# Altium PCB PowerSplitter.PcbDoc
Units mm, origin at the board's own origin, x right, y up, seen from the top; angles counter-clockwise.
Board outline 20 x 20 mm, 2 copper layers (Top Layer, Bottom Layer); 6 components, 5 nets, 21 pads, 0 vias.
Unrouted connection lines stored in the file: 1.
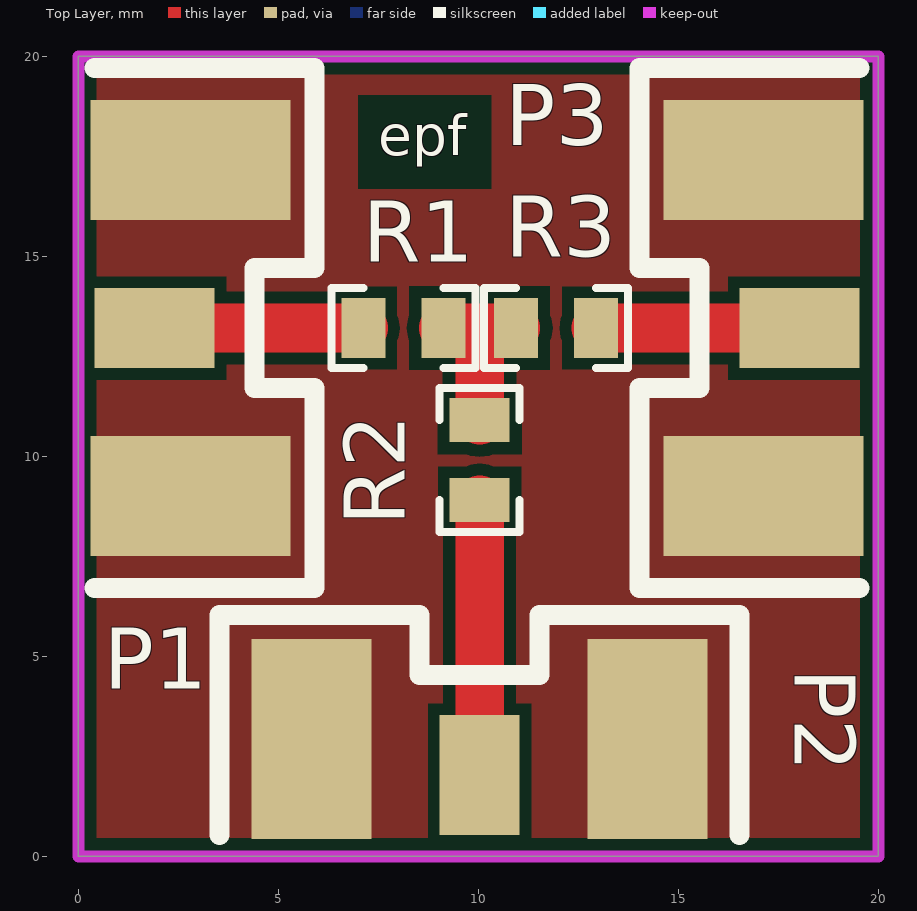
[diagram p0: Top Layer view]
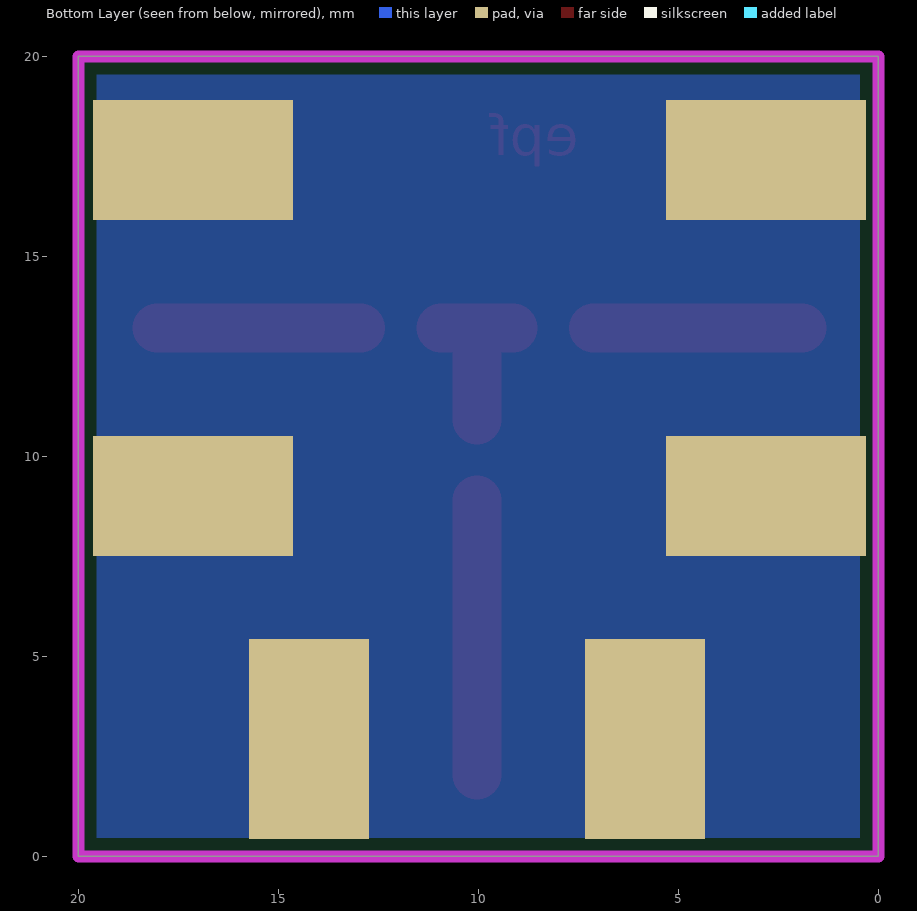
[diagram p1: Bottom Layer view, seen from below]

## Layer stack, top to bottom
Top Layer: signal copper 0.0356
Dielectric: dielectric 0.32, FR-4, Dk 4.8
Bottom Layer: signal copper 0.0356

## Board outline
0,0 20,0 20,20 0,20

## Design rules (kind name [scope] priority, off if disabled: settings)
Clearance [All] p1: gap=0.3
PolygonConnect [All] p1: connectstyle=Direct reliefconductorwidth=0.254 reliefentries=4 polygonreliefangle="90 Angle"
RoomDefinition DivisorPotResistva [InComponentClass('DivisorPotResistva')] p1: confinementstyle=ConfineIn formatcopy=TRUE lockcomponents=TRUE outline -11.684,-9.779 29.845,-9.779 29.845,24.765 -11.684,24.765
RoutingVias [All] p1: holewidth=0.6 width=1 viastyle="Through Hole" minholewidth=0.711 minwidth=1.27 maxholewidth=0.711 maxwidth=1.27
SilkscreenOverComponentPads [All] p1: minsilkscreentomaskgap=0.254
SolderMaskExpansion [All] p1: expansion=0.102
Width [All] p1: maxlimit=2 minlimit=0.2 preferedwidth=1.219
27 further rules are at their usual default settings.

## Components (designator, comment, footprint, x,y, rotation, side; value= is the part's Value field where it differs from the comment)
P1 "SMA2" SMAL2 1.905,13.208 r90 top
P2 "SMA2" SMAL2 10.033,2.032 r180 top
P3 "SMA2" SMAL2 18.034,13.208 r270 top
R1 "Resistor" 0805_RES 8.128,13.208 r180 top
R2 "Resistor" 0805_RES 10.033,9.906 r90 top
R3 "Resistor" 0805_RES 11.938,13.208 r180 top

## Footprints (in the part's own frame and the unit in brackets; to place one, negate y for a bottom-side part, rotate by r counter-clockwise, add the part's x,y. Pads: shape width x height; smd on the part's side, far side on the other; paste and mask are expansions set on the pad)
0805_RES [mm]
  rect 1.1x1.5 smd: 1(-1,0) 2(1,0)
  silkscreen extent -1.8,-1 1.8,1, body extent -1,-0.62 1,0.63, height 0.78
SMAL2 [mm]
  rect 3x5 smd: 0(-4.2,-0.9) 0(4.2,-0.9)
  rect 3x5 smd far side: 0(-4.2,-0.9) 0(4.2,-0.9)
  rect 2x3 smd: 1(0,0)
  silkscreen extent -6.5,-4 6.5,1.5, body extent -4.76,-2.97 4.76,10.86, height 4.06

## Part data
P1 P2 P3: "BNC Elbow Connector"
R1 R2 R3: library part Res

## Nets (pads, with @x,y where several pads share a name; then routed paths per layer and width w, separated by ;. In a path a pad name is that pad's centre, name@x,y a point inside that pad or via, vN(x,y) a via of type N, cw(c..) or ccw(c..) an arc to the next point about the centre after c; other vN are vias at no path point)
GND: P1.0 P2.0 P3.0
IN: P2.1 R2.1 | length 6.9
  Top Layer w1.219: P2.1 R2.1
NetR1_1: R1.1 R2.2 R3.2 | length 4.1
  Top Layer w1.219: R1.1 10.033,13.208 ; R2.2 10.033,13.208 ; R3.2 10.033,13.208
OUT2: P1.1 R1.2 | length 5.2
  Top Layer w1.219: P1.1 R1.2
OUT3: P3.1 R3.1 | length 5.1
  Top Layer w1.219: R3.1 P3.1

## Polygon pours and split planes (outlines as drawn)
GND on Bottom Layer "BOTTOMGND" (solid, remove dead copper): 0,0 0,20 20,20 20,0
GND on Top Layer "TOPGND" (solid, remove dead copper): 0,0 0,20 20,20 20,0

## Keep-outs
Keep-Out Layer:
  the board outline again, w0.3

## Other copper
Top Layer:
  text "epf" at 7.493,17.526 h1

## Silkscreen, mask and mechanical layers (free items; w line width, h text height)
Top Overlay:
  text "epf" at 7.493,17.526 h1

## Dimensions
0,0 to 0,20 on Mechanical 1
0,0 to 20,0 on Mechanical 1